# EAGLE board panel_2x1 (EAGLE 7.5.0)
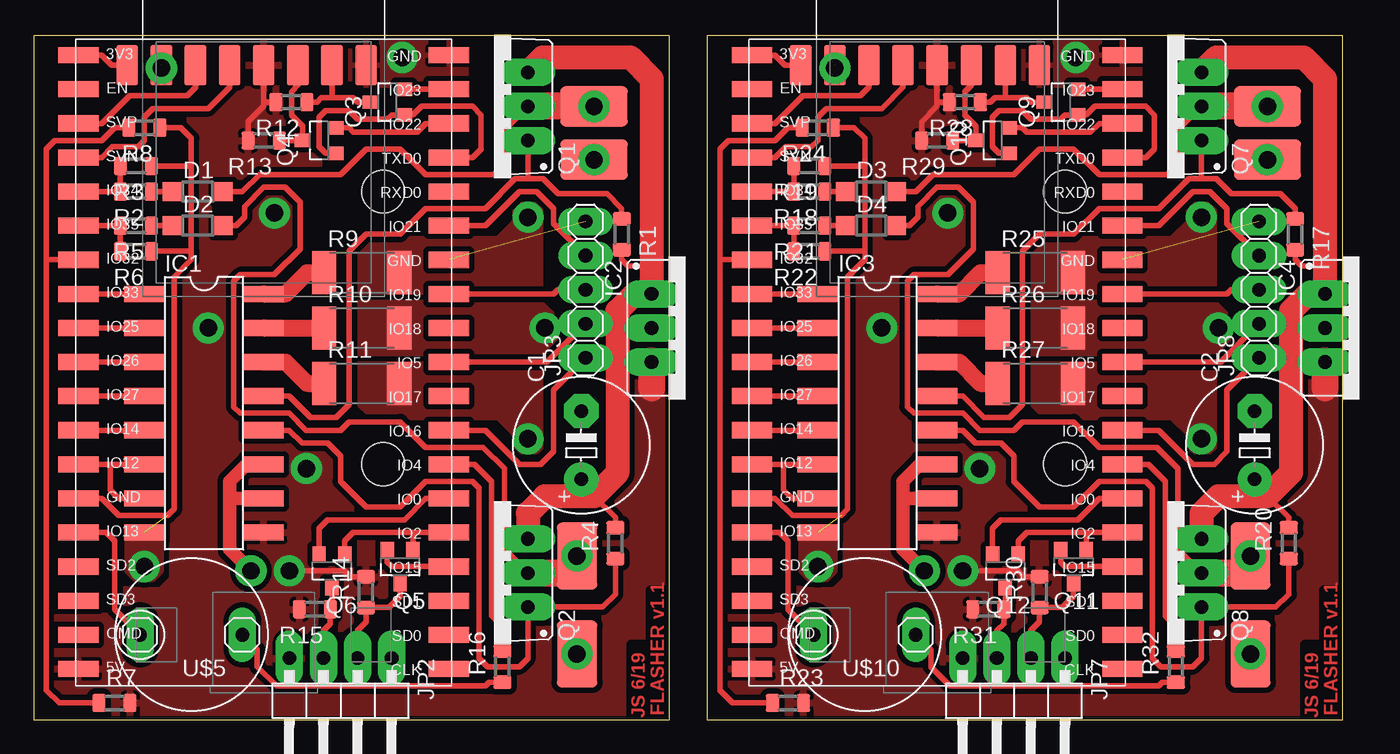
[diagram p0: board, top side]
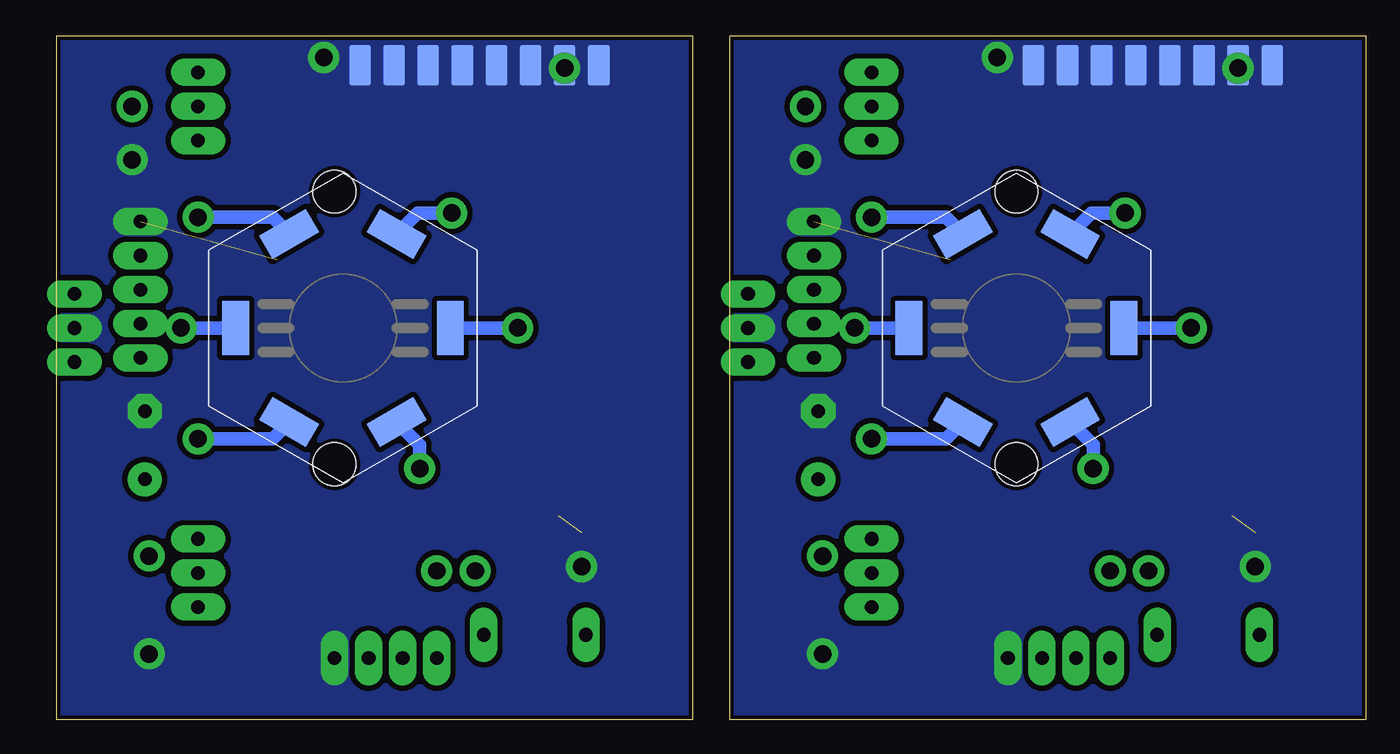
[diagram p1: board, bottom side, seen from below]

Size 97.53 x 51 mm. Coordinates in mm from the lower left corner, seen from the top.
Outline: 0,0 47.37,0 47.37,51 0,51 0,0
Outline: 50.16,0 97.53,0 97.53,51 50.16,51 50.16,0
Copper layers (1*16): Top 0.035mm / dielectric 1.5mm / Bottom 0.035mm
Design rules "homemade": minimum track width 0.4mm, minimum drill 0.8mm, track to track 0.4mm, track to pad 0.4mm, pad to pad 0.4mm, via to via 0.4mm, smd to smd 0mil, copper to edge 0.3mm, drill to drill 8mil, minimum pad ring 0.4mm, minimum via ring 0.3mm, stop-mask expansion 4mil, vias tented up to drill 0mil, thermal gap 10mil
Holes 3.2 mm at 26.04,39.37 26.04,19.05 76.83,39.37 76.83,19.05
tRestrict: area 23.1,16.2 to 28.9,21.9; area 23.1,36.5 to 28.9,42.3; area 73.3,16.2 to 79.1,21.9; area 73.3,36.5 to 79.1,42.3

## Footprints (pad centres in the part's own frame; a part is rotated, then mirrored left to right if it is on the bottom)
E5-10,5 = drill 1.016 pad 2.54: + -2.54,0 | drill 1.016 pad 2.54 octagon: - 2.54,0
SOD123 = smd 1.4 x 1.4: A 1.9,0; C -1.9,0
DIL16_BIG_SMD = smd 1.2 x 3: 1 -8.89,-4.445; 2 -6.35,-4.445; 3 -3.81,-4.445; 4 -1.27,-4.445; 5 1.27,-4.445; 6 3.81,-4.445; 7 6.35,-4.445; 8 8.89,-4.445; 9 8.89,4.445; 10 6.35,4.445; 11 3.81,4.445; 12 1.27,4.445; 13 -1.27,4.445; 14 -3.81,4.445; 15 -6.35,4.445; 16 -8.89,4.445
78XXS = drill 1.016 long: GND 0,-2.54; IN -2.54,-2.54; OUT 2.54,-2.54
DEVKITC_BIG_SMD = smd 3 x 1.2: 1 -13.8,46.99; 2 -13.8,44.45; 3 -13.8,41.91; 4 -13.8,39.37; 5 -13.8,36.83; 6 -13.8,34.29; 7 -13.8,31.75; 8 -13.8,29.21; 9 -13.8,26.67; 10 -13.8,24.13; 11 -13.8,21.59; 12 -13.8,19.05; 13 -13.8,16.51; 14 -13.8,13.97; 15 -13.8,11.43; 16 -13.8,8.89; 17 -13.8,6.35; 18 -13.8,3.81; 19 -13.8,1.27; 20 13.8,1.27; 21 13.8,3.81; 22 13.8,6.35; 23 13.8,8.89; 24 13.8,11.43; 25 13.8,13.97; 26 13.8,16.51; 27 13.8,19.05; 28 13.8,21.59; 29 13.8,24.13; 30 13.8,26.67; 31 13.8,29.21; 32 13.8,31.75; 33 13.8,34.29; 34 13.8,36.83; 35 13.8,39.37; 36 13.8,41.91; 37 13.8,44.45; 38 13.8,46.99
PINH2X04SMD = smd 1.6 x 3 bottom: B1 -3.81,-2; B2 -1.27,-2; B3 1.27,-2; B4 3.81,-2 | smd 1.6 x 3: T1 -3.81,-2; T2 -1.27,-2; T3 1.27,-2; T4 3.81,-2
1X04/90 = drill 1.016 long: 1 -3.81,-3.81; 2 -1.27,-3.81; 3 1.27,-3.81; 4 3.81,-3.81
1X05 = drill 1.016 long: 1 -5.08,0; 2 -2.54,0; 3 0,0; 4 2.54,0; 5 5.08,0
HEX_HEATSINK = smd 4 x 2 rotated 330: B+ 4,7; R- -4,-7 | smd 4 x 2 rotated 210: B- -4,7; R+ 4,-7 | smd 2 x 4: G+ 8,0; G- -8,0
TO220BV = drill 1.016 long: D 0,-2.54; G -2.54,-2.54; S 2.54,-2.54
SOT23_DIST = smd 1 x 1.2: 1 -0.95,-1.227; 2 0.95,-1.227; 3 0,1.227
R0805S = smd 1 x 1.35: 1 -1.15,0; 2 1.15,0
R2512 = smd 1.8 x 3.2: 1 -2.8,0; 2 2.8,0
3X5MM = smd 3 x 5: 1 0,0
PIEZO = drill 1.016 long: + 1.27,8.89; - 1.27,1.27

## Placement (x,y rotation side)
C1  [E5-10,5]  40.8,20.48 90 top
C2  [E5-10,5]  90.96,20.48 90 top
D1  [SOD123]  12.22,39.37 0 top
D2  [SOD123]  12.22,36.83 0 top
D3  [SOD123]  62.39,39.37 0 top
D4  [SOD123]  62.39,36.83 0 top
IC1  ULN2004A_BIG_SMD  [DIL16_BIG_SMD]  12.7,22.86 270 top
IC2  [78XXS]  48.58,29.21 270 top
IC3  ULN2004A_BIG_SMD  [DIL16_BIG_SMD]  62.87,22.86 270 top
IC4  [78XXS]  98.74,29.21 270 top
IM1  DEVKITC_BIG_SMD  [DEVKITC_BIG_SMD]  17.14,2.54 0 top
IM2  DEVKITC_BIG_SMD  [DEVKITC_BIG_SMD]  67.31,2.54 0 top
JP1  [PINH2X04SMD]  20.95,50.8 0 top
JP2  [1X04/90]  22.86,0.79 180 top
JP3  [1X05]  41.12,32.07 90 top
JP4  [PINH2X04SMD]  10.79,50.8 0 top
JP5  [PINH2X04SMD]  71.12,50.8 0 top
JP6  [PINH2X04SMD]  60.96,50.8 0 top
JP7  [1X04/90]  73.03,0.79 180 top
JP8  [1X05]  91.28,32.07 90 top
LED1  [HEX_HEATSINK]  26.04,29.21 0 bottom
LED2  [HEX_HEATSINK]  76.2,29.21 0 bottom
Q1  IRF4905  [TO220BV]  34.29,45.72 90 top
Q2  IRF4905  [TO220BV]  34.29,10.95 90 top
Q3  [SOT23_DIST]  26.35,46.04 90 top
Q4  [SOT23_DIST]  21.27,43.18 90 top
Q5  [SOT23_DIST]  27.3,11.43 180 top
Q6  [SOT23_DIST]  22.23,11.11 180 top
Q7  IRF4905  [TO220BV]  84.45,45.72 90 top
Q8  IRF4905  [TO220BV]  84.45,10.95 90 top
Q9  [SOT23_DIST]  76.52,46.04 90 top
Q10  [SOT23_DIST]  71.44,43.18 90 top
Q11  [SOT23_DIST]  77.47,11.43 180 top
Q12  [SOT23_DIST]  72.39,11.11 180 top
R1  100k  [R0805S]  43.81,36.2 270 top
R2  18k  [R0805S]  7.62,39.37 180 top
R3  33k  [R0805S]  7.62,41.27 180 top
R4  100k  [R0805S]  43.34,13.18 90 top
R5  18k  [R0805S]  7.62,36.83 180 top
R6  33k  [R0805S]  7.62,34.92 180 top
R7  4k7  [R0805S]  6.03,1.27 0 top
R8  1k  [R0805S]  8.26,44.13 180 top
R9  10R  [R2512]  24.45,33.34 0 top
R10  10R  [R2512]  24.45,29.21 0 top
R11  10R  [R2512]  24.45,25.08 0 top
R12  18k  [R0805S]  19.21,46.04 180 top
R13  18k  [R0805S]  17.14,43.18 180 top
R14  18k  [R0805S]  24.77,9.53 90 top
R15  18k  [R0805S]  20.95,8.26 180 top
R16  18k  [R0805S]  34.92,3.97 90 top
R17  100k  [R0805S]  93.98,36.2 270 top
R18  18k  [R0805S]  57.78,39.37 180 top
R19  33k  [R0805S]  57.78,41.27 180 top
R20  100k  [R0805S]  93.5,13.18 90 top
R21  18k  [R0805S]  57.78,36.83 180 top
R22  33k  [R0805S]  57.78,34.92 180 top
R23  4k7  [R0805S]  56.2,1.27 0 top
R24  1k  [R0805S]  58.42,44.13 180 top
R25  10R  [R2512]  74.61,33.34 0 top
R26  10R  [R2512]  74.61,29.21 0 top
R27  10R  [R2512]  74.61,25.08 0 top
R28  18k  [R0805S]  69.37,46.04 180 top
R29  18k  [R0805S]  67.31,43.18 180 top
R30  18k  [R0805S]  74.93,9.53 90 top
R31  18k  [R0805S]  71.12,8.26 180 top
R32  18k  [R0805S]  85.09,3.97 90 top
U$1  PAD_1SIDE_LARGE  [3X5MM]  41.75,45.72 270 top
U$2  PAD_1SIDE_LARGE  [3X5MM]  41.75,41.75 270 top
U$3  PAD_1SIDE_LARGE  [3X5MM]  40.48,12.22 180 top
U$4  PAD_1SIDE_LARGE  [3X5MM]  40.48,4.92 0 top
U$5  PIEZO  [PIEZO]  16.83,5.08 90 top
U$6  PAD_1SIDE_LARGE  [3X5MM]  91.92,45.72 270 top
U$7  PAD_1SIDE_LARGE  [3X5MM]  91.92,41.75 270 top
U$8  PAD_1SIDE_LARGE  [3X5MM]  90.65,12.22 180 top
U$9  PAD_1SIDE_LARGE  [3X5MM]  90.65,4.92 0 top
U$10  PIEZO  [PIEZO]  66.99,5.08 90 top

## Library data of the parts
C1 C2 R1-R32 = rcl_upravena
D1-D4 = diode
IC1 IC3 = uln-udn_upravena
IC2 IC4 = v-reg
IM1 IM2 = esp32
JP1 JP4-JP6 = pinhead_smd
JP2 JP3 JP7 JP8 = pinhead
LED1 LED2 = RGB_LED
Q1 Q2 Q7 Q8 = transistor-power
Q3-Q6 Q9-Q12 = transistors
U$1-U$4 U$6-U$9 = wirepad_smd
U$5 U$10 = piezo

## Nets
!B: IC1.16 R9.1
!B1: IC3.16 R25.1
!G: IC1.15 R10.1
!G1: IC3.15 R26.1
!PWR1_EN: IC1.13 Q1.G R1.1
!PWR1_EN1: IC3.13 Q7.G R17.1
!PWR2_EN: IC1.12 Q2.G R4.1
!PWR2_EN1: IC3.12 Q8.G R20.1
!R: IC1.14 R11.1
!R1: IC3.14 R27.1
!W: IC1.10 IC1.11
!W1: IC3.10 IC3.11
+3V1: IM2.1 JP6.T1
+3V3: IM1.1 JP4.T1
+5V: IC1.9 IC2.OUT IM1.19 JP1.T1 JP2.4 LED1.B+ LED1.G+ LED1.R+ R7.2 R12.2 R13.2 R14.2 R15.2
+5V1: IC3.9 IC4.OUT IM2.19 JP5.T1 JP7.4 LED2.B+ LED2.G+ LED2.R+ R23.2 R28.2 R29.2 R30.2 R31.2
B: IC1.1 IM1.8
B1: IC3.1 IM2.8
BA: LED1.B- R9.2
BA1: LED2.B- R25.2
BUZZ-N: R16.1 U$5.-
BUZZ-N1: R32.1 U$10.-
BUZZ_N: IM1.26 R16.2
BUZZ_N1: IM2.26 R32.2
BUZZ_P: IM1.15 U$5.+
BUZZ_P1: IM2.15 U$10.+
EN: IM1.2
EN1: IM2.2
G: IC1.2 IM1.9
G1: IC3.2 IM2.9
GA: LED1.G- R10.2
GA1: LED2.G- R26.2
GND: C1.- IC1.8 IC2.GND IM1.14 IM1.32 IM1.38 JP1.B1 JP1.B2 JP1.B3 JP1.B4 JP1.T4 JP2.1 JP3.5 JP4.B1 JP4.B2 JP4.B3 JP4.B4 JP4.T2 R3.1 R6.1 R8.1 U$2.1 U$4.1
GND1: C2.- IC3.8 IC4.GND IM2.14 IM2.32 IM2.38 JP5.B1 JP5.B2 JP5.B3 JP5.B4 JP5.T4 JP6.B1 JP6.B2 JP6.B3 JP6.B4 JP6.T2 JP7.1 JP8.5 R19.1 R22.1 R24.1 U$7.1 U$9.1
IO0: IM1.25 Q6.2
IO0_1: JP7.3 Q12.3 R31.1
IO0_5: JP2.3 Q6.3 R15.1
IO1: IM2.16
IO1_EN: IM1.24 Q5.1 Q6.1
IO1_EN1: IM2.24 Q11.1 Q12.1
IO2: IM2.17
IO2_EN: IM1.35 Q3.1 Q4.1
IO2_EN1: IM2.35 Q9.1 Q10.1
IO3: IM1.34
IO4: IM2.18
IO5: IM1.29 JP3.2
IO6: IM1.20
IO7: IM1.21
IO8: IM1.22
IO9: IM1.16
IO10: IM1.17
IO11: IM1.18
IO12: IM2.20
IO13: IM2.21
IO14: IM2.22
IO15: IM1.23 Q5.2
IO15_1: JP7.2 Q11.3 R30.1
IO15_5: JP2.2 Q5.3 R14.1
IO16: IM1.27 JP3.1
IO17: IM1.28
IO18: IM1.30
IO19: IM1.31 JP3.3
IO20: IM2.37 Q9.2
IO21: IM1.33 JP3.4
IO22: IM1.36 Q4.2
IO22_1: JP5.T2 Q10.3 R29.1
IO22_5: JP1.T2 Q4.3 R13.1
IO23: IM1.37 Q3.2
IO23_1: JP5.T3 Q9.3 R28.1
IO23_5: JP1.T3 Q3.3 R12.1
IO24: IM2.36 Q10.2
IO25: IM2.25 Q12.2
IO26: IM2.23 Q11.2
IO27: IM2.33 JP8.4
IO28: IM2.31 JP8.3
IO29: IM2.30
IO30: IM2.28
IO31: IM2.29 JP8.2
IO32: IM2.27 JP8.1
IO33: IM2.3 JP6.T3
IO34: IM2.4 JP6.T4
IO35: IM2.34
IO36: IM1.3 JP4.T3
IO39: IM1.4 JP4.T4
PWR1: D1.A Q1.D U$1.1
PWR1+: D1.C R2.1
PWR1+1: D3.C R18.1
PWR1_EN: IC1.4 IM1.11
PWR1_EN1: IC3.4 IM2.11
PWR1_MEAS: IM1.5 R2.2 R3.2
PWR1_MEAS1: IM2.5 R18.2 R19.2
PWR2: D2.A Q2.D U$3.1
PWR2+: D2.C R5.1
PWR2+1: D4.C R21.1
PWR2_EN: IC1.5 IM1.12
PWR2_EN1: IC3.5 IM2.12
PWR2_MEAS: IM1.6 R5.2 R6.2
PWR2_MEAS1: IM2.6 R21.2 R22.2
PWR3: D3.A Q7.D U$6.1
PWR4: D4.A Q8.D U$8.1
PWR_MEAS: IM1.7 R7.1 R8.2
PWR_MEAS1: IM2.7 R23.1 R24.2
R: IC1.3 IM1.10
R1: IC3.3 IM2.10
RA: LED1.R- R11.2
RA1: LED2.R- R27.2
VCC: C1.+ IC2.IN Q1.S Q2.S R1.2 R4.2
VCC1: C2.+ IC4.IN Q7.S Q8.S R17.2 R20.2
W: IC1.6 IC1.7 IM1.13
W1: IC3.6 IC3.7 IM2.13

## Tracks (layer width: path | path; a pad name or v marks a point on that pad's centre or on a via)
!B
  Top 1.27: IC1.16 18.79,31.75 20.38,33.34 R9.1
!B1
  Top 1.27: IC3.16 68.95,31.75 70.54,33.34 R25.1
!G
  Top 1.27: IC1.15 R10.1
!G1
  Top 1.27: IC3.15 R26.1
!PWR1_EN
  Top 0.406: IC1.13 19.05,24.13 20.64,22.54 22.54,22.54 23.5,23.5 23.5,34.92 24.77,36.2 27.3,36.2 29.21,38.1 33.66,38.1 35.88,40.32 36.83,40.32 | 36.83,40.32 37.94,40.32 39.05,39.21 42.7,39.21 43.81,38.1 R1.1 | Q1.G 36.83,40.32
!PWR1_EN1
  Top 0.406: IC3.13 69.22,24.13 70.8,22.54 72.71,22.54 73.66,23.5 73.66,34.92 74.93,36.2 77.47,36.2 79.38,38.1 83.82,38.1 86.04,40.32 87,40.32 | 87,40.32 88.11,40.32 89.22,39.21 92.87,39.21 93.98,38.1 R17.1 | Q7.G 87,40.32
!PWR2_EN
  Top 0.406: IC1.12 19.05,21.59 20,20.64 21.91,20.64 22.86,19.68 22.86,17.78 24.77,15.88 27.3,15.88 29.21,17.78 32.7,17.78 33.18,17.3 33.18,4.6 33.81,3.97 36.2,3.97 36.83,4.6 Q2.G 42.39,8.41 43.34,9.37 R4.1
!PWR2_EN1
  Top 0.406: IC3.12 69.22,21.59 70.17,20.64 72.07,20.64 73.03,19.68 73.03,17.78 74.93,15.88 77.47,15.88 79.38,17.78 82.87,17.78 83.34,17.3 83.34,4.6 83.98,3.97 86.36,3.97 87,4.6 Q8.G 92.55,8.41 93.5,9.37 R20.1
!R
  Top 1.27: IC1.14 18.79,26.67 20.38,25.08 R11.1
!R1
  Top 1.27: IC3.14 68.95,26.67 70.54,25.08 R27.1
!W  (via drill 1.3)
  Top 1.016: IC1.11 15.88,19.05 14.61,17.78 14.61,16.51 | 14.61,16.51 14.61,12.7 v16.19,11.11 | IC1.10 14.61,16.51
!W1  (via drill 1.3)
  Top 1.016: IC3.11 66.04,19.05 64.77,17.78 64.77,16.51 | 64.77,16.51 64.77,12.7 v66.36,11.11 | IC3.10 64.77,16.51
+3V1
  Top 0.406: IM2.1 55.24,49.53 55.98,48.8 JP6.T1
+3V3
  Top 0.406: IM1.1 5.08,49.53 5.81,48.8 JP4.T1
+5V  (via drill 1.3)
  Top 0.406: JP1.T1 17.14,46.04 | 17.14,46.04 17.14,45.72 15.99,44.57 R13.2 | R12.2 17.14,46.04 | R14.2 23.61,10.68 23.18,11.11 v19.05,11.11
  Top 2: IC2.OUT 46.04,24.77
  Bottom 1.016: LED1.R+ 20.32,20.5 v20.32,18.73 | LED1.G+ v13.02,29.21 | LED1.B+ 20.46,37.78 v17.94,37.78
  pour Top (rank 3): 0,50.8 0,0 47.47,0 47.47,50.8
+5V1  (via drill 1.3)
  Top 0.406: JP5.T1 67.31,46.04 | 67.31,46.04 67.31,45.72 66.16,44.57 R29.2 | R28.2 67.31,46.04 | R30.2 73.78,10.68 73.34,11.11 v69.22,11.11
  Top 2: IC4.OUT 96.2,24.77
  Bottom 1.016: LED2.R+ 70.48,20.5 v70.48,18.73 | LED2.G+ v63.18,29.21 | LED2.B+ 70.63,37.78 v68.1,37.78
  pour Top (rank 3): 50.16,50.8 50.16,0 97.63,0 97.63,50.8
B
  Top 0.406: IM1.8 IC1.1
B1
  Top 0.406: IM2.8 IC3.1
BA  (via drill 1.3)
  Bottom 1.016: LED1.B- 31.29,37.47 v36.83,37.47
  pour Top (rank 2, no thermals): 23.97,31.75 37.78,31.75 37.78,38.1 37.47,38.42 36.2,38.42 35.88,38.1 35.88,37.15 34.61,35.88 25.24,35.88 23.97,34.61
BA1  (via drill 1.3)
  Bottom 1.016: LED2.B- 81.45,37.47 v87,37.47
  pour Top (rank 2, no thermals): 74.14,31.75 87.95,31.75 87.95,38.1 87.63,38.42 86.36,38.42 86.04,38.1 86.04,37.15 84.77,35.88 75.41,35.88 74.14,34.61
BUZZ-N
  Top 0.406: U$5.- 16.67,5.24 16.67,3.97 18.1,2.54 33.66,2.54 33.93,2.82 R16.1
BUZZ-N1
  Top 0.406: U$10.- 66.83,5.24 66.83,3.97 68.26,2.54 83.82,2.54 84.1,2.82 R32.1
BUZZ_N
  Top 0.406: IM1.26 32.86,19.05 34.13,17.78 34.13,7.78 34.92,6.99 R16.2
BUZZ_N1
  Top 0.406: IM2.26 83.03,19.05 84.3,17.78 84.3,7.78 85.09,6.99 R32.2
BUZZ_P
  Top 0.406: IM1.15 5.4,13.97 6.03,13.34 6.03,8.26 U$5.+
BUZZ_P1
  Top 0.406: IM2.15 55.56,13.97 56.2,13.34 56.2,8.26 U$10.+
G
  Top 0.406: IM1.9 IC1.2
G1
  Top 0.406: IM2.9 IC3.2
GA  (via drill 1.3)
  Bottom 1.016: LED1.G- v38.1,29.21
  pour Top (no thermals): 23.97,31.11 37.78,31.11 39.05,29.84 39.05,28.57 37.78,27.3 23.97,27.3
GA1  (via drill 1.3)
  Bottom 1.016: LED2.G- v88.27,29.21
  pour Top (no thermals): 74.14,31.11 87.95,31.11 89.22,29.84 89.22,28.57 87.95,27.3 74.14,27.3
GND  (via drill 1.3)  (3 unrouted)
  Top 0.406: IM1.14 5.08,16.51 6.35,15.24 10,15.24 10.48,15.72 10.48,33.02 11.75,34.29 11.75,34.92 | R6.1 11.75,34.92 | 11.75,34.92 11.75,41.27 | 11.75,41.27 11.75,43.34 10.95,44.13 R8.1 | R3.1 11.75,41.27
  other vias: 8.26,11.43 27.46,49.37 9.53,48.58 41.75,41.75 40.48,4.92
  pour Top (no thermals): 6.99,14.29 9.53,14.29 9.53,11.11 8.89,10.48 7.62,10.48 6.99,11.11
  pour Bottom (rank 3, no thermals): 0,0 47.62,0 47.62,50.8 0,50.8
  pour Top: 23.5,50.8 32.23,50.8 32.23,45.72 28.57,45.72 26.99,47.31 23.5,47.31
GND1  (via drill 1.3)  (3 unrouted)
  Top 0.406: IM2.14 55.24,16.51 56.52,15.24 60.17,15.24 60.64,15.72 60.64,33.02 61.91,34.29 61.91,34.92 | R22.1 61.91,34.92 | 61.91,34.92 61.91,41.27 | 61.91,41.27 61.91,43.34 61.12,44.13 R24.1 | R19.1 61.91,41.27
  other vias: 58.42,11.43 77.63,49.37 59.69,48.58 91.92,41.75 90.65,4.92
  pour Top (no thermals): 57.15,14.29 59.69,14.29 59.69,11.11 59.05,10.48 57.78,10.48 57.15,11.11
  pour Bottom (rank 3, no thermals): 50.16,0 97.79,0 97.79,50.8 50.16,50.8
  pour Top: 73.66,50.8 82.39,50.8 82.39,45.72 78.74,45.72 77.15,47.31 73.66,47.31
IO0
  Top 0.406: IM1.25 29.21,16.51 27.62,14.92 21.91,14.92 21.27,14.29 Q6.2
IO0_1
  Top 0.406: Q12.3 72.39,8.26 R31.1 72.27,7.18 71.75,6.67 JP7.3
IO0_5
  Top 0.406: Q6.3 22.23,8.26 R15.1 22.11,7.18 21.59,6.67 JP2.3
IO1_EN
  Top 0.406: IM1.24 28.26,13.97 | 28.26,13.97 23.81,13.97 23.18,13.34 Q6.1 | Q5.1 28.25,13.97 28.26,13.97
IO1_EN1
  Top 0.406: IM2.24 78.42,13.97 | 78.42,13.97 73.98,13.97 73.34,13.34 Q12.1 | Q11.1 78.42,13.97
IO2_EN
  Top 0.406: Q4.1 21.75,42.23 21.27,42.7 21.27,44.93 21.75,45.4 23.5,45.4 24.13,44.77 26.35,44.77 26.67,45.09 Q3.1 28.26,45.09 28.89,45.72 32.7,45.72 33.34,45.09 33.34,42.55 32.7,41.91 IM1.35
IO2_EN1
  Top 0.406: Q10.1 71.91,42.23 71.44,42.7 71.44,44.93 71.91,45.4 73.66,45.4 74.3,44.77 76.52,44.77 76.83,45.09 Q9.1 78.42,45.09 79.06,45.72 82.87,45.72 83.5,45.09 83.5,42.55 82.87,41.91 IM2.35
IO5
  Top 0.406: IM1.29 38.26,26.67 JP3.2
IO15
  Top 0.406: IM1.23 26.67,11.43 26.35,11.75 Q5.2
IO15_1
  Top 0.406: Q11.3 77.47,9.21 76.64,8.38 R30.1 74.93,7.3 74.3,6.67 JP7.2
IO15_5
  Top 0.406: Q5.3 27.3,9.21 26.47,8.38 R14.1 24.77,7.3 24.13,6.67 JP2.2
IO16
  Top 0.406: IM1.27 33.66,21.59 36.2,19.05 37.78,19.05 38.73,20 38.73,24.61 JP3.1
IO19
  Top 0.406: IM1.31 38.73,31.75 39.05,32.07 JP3.3
IO20
  Top 0.406: Q9.2 IM2.37
IO21
  Top 0.406: IM1.33 33.66,36.83 36.2,39.37 37.47,39.37 38.73,38.1 38.73,36.99 JP3.4
IO22
  Top 0.406: IM1.36 29.21,44.45 28.57,43.81 23.81,43.81 23.5,44.13 Q4.2
IO22_1
  Top 0.406: JP5.T2 69.85,47.31 69.37,46.83 69.37,45.09 70.21,44.25 Q10.3 R29.1
IO22_5
  Top 0.406: JP1.T2 19.68,47.31 19.21,46.83 19.21,45.09 20.05,44.25 Q4.3 R13.1
IO23
  Top 0.406: Q3.2 IM1.37
IO23_1
  Top 0.406: Q9.3 74.3,46.04 73.98,46.35 72.39,46.35 | 72.39,46.35 JP5.T3 | R28.1 71.28,46.04 71.6,46.35 72.39,46.35
IO23_5
  Top 0.406: Q3.3 24.13,46.04 23.81,46.35 22.23,46.35 | 22.23,46.35 JP1.T3 | R12.1 21.11,46.04 21.43,46.35 22.23,46.35
IO24
  Top 0.406: IM2.36 79.38,44.45 78.74,43.81 73.98,43.81 73.66,44.13 Q10.2
IO25
  Top 0.406: IM2.25 79.38,16.51 77.79,14.92 72.07,14.92 71.44,14.29 Q12.2
IO26
  Top 0.406: IM2.23 76.83,11.43 76.52,11.75 Q11.2
IO27
  Top 0.406: IM2.33 83.82,36.83 86.36,39.37 87.63,39.37 88.9,38.1 88.9,36.99 JP8.4
IO28
  Top 0.406: IM2.31 88.9,31.75 89.22,32.07 JP8.3
IO31
  Top 0.406: IM2.29 88.42,26.67 JP8.2
IO32
  Top 0.406: IM2.27 83.82,21.59 86.36,19.05 87.95,19.05 88.9,20 88.9,24.61 JP8.1
IO33
  Top 0.406: IM2.3 55.24,44.45 57.31,46.51 61.59,46.51 62.23,47.15 JP6.T3
IO34
  Top 0.406: IM2.4 55.24,41.91 56.04,42.7 57.94,42.7 58.42,43.18 58.42,44.93 59.05,45.56 63.18,45.56 64.77,47.15 JP6.T4
IO36
  Top 0.406: IM1.3 5.08,44.45 7.14,46.51 11.43,46.51 12.06,47.15 JP4.T3
IO39
  Top 0.406: IM1.4 5.08,41.91 5.87,42.7 7.78,42.7 8.26,43.18 8.26,44.93 8.89,45.56 13.02,45.56 14.61,47.15 JP4.T4
PWR1  (via drill 1.3)
  Top 0.406: D1.A 15.56,39.37 16.83,40.64 22.86,40.64 24.77,42.55 27.3,42.55 29.21,40.64 34.29,40.64 35.08,41.43 35.08,43.97 Q1.D
  Top 2: U$1.1 Q1.D
  other vias: 41.75,45.72
PWR1+
  Top 0.406: R2.1 D1.C
PWR1+1
  Top 0.406: R18.1 D3.C
PWR1_EN
  Top 0.406: IM1.11 IC1.4
PWR1_EN1
  Top 0.406: IM2.11 IC3.4
PWR1_MEAS
  Top 0.406: IM1.5 R2.2 R3.2
PWR1_MEAS1
  Top 0.406: IM2.5 R18.2 R19.2
PWR2  (via drill 1.3)
  Top 0.406: D2.A 15.08,36.83 15.72,37.47 15.72,38.26 17.14,39.69 18.73,39.69 19.84,38.58 19.84,35.08 17.94,33.18 15.4,33.18 14.92,32.7 14.92,23.34 15.4,22.86 19.05,22.86 20.32,21.59 22.86,21.59 23.5,22.23 27.3,22.23 29.21,20.32 33.5,20.32 35.08,18.73 35.08,12.7 Q2.D
  Top 2: Q2.D 40.48,10.95 U$3.1
  other vias: 40.48,12.22
PWR2+
  Top 0.406: R5.1 D2.C
PWR2+1
  Top 0.406: R21.1 D4.C
PWR2_EN
  Top 0.406: IM1.12 IC1.5
PWR2_EN1
  Top 0.406: IM2.12 IC3.5
PWR2_MEAS
  Top 0.406: IM1.6 R5.2 R6.2
PWR2_MEAS1
  Top 0.406: IM2.6 R21.2 R22.2
PWR3  (via drill 1.3)
  Top 0.406: D3.A 65.72,39.37 66.99,40.64 73.03,40.64 74.93,42.55 77.47,42.55 79.38,40.64 84.45,40.64 85.25,41.43 85.25,43.97 Q7.D
  Top 2: U$6.1 Q7.D
  other vias: 91.92,45.72
PWR4  (via drill 1.3)
  Top 0.406: D4.A 65.25,36.83 65.88,37.47 65.88,38.26 67.31,39.69 68.9,39.69 70.01,38.58 70.01,35.08 68.1,33.18 65.56,33.18 65.09,32.7 65.09,23.34 65.56,22.86 69.22,22.86 70.48,21.59 73.03,21.59 73.66,22.23 77.47,22.23 79.38,20.32 83.66,20.32 85.25,18.73 85.25,12.7 Q8.D
  Top 2: Q8.D 90.65,10.95 U$8.1
  other vias: 90.65,12.22
PWR_MEAS
  Top 0.406: R7.1 1.91,1.27 0.95,2.22 0.95,34.29 | 0.95,34.29 0.95,42.55 1.59,43.18 5.08,43.18 6.03,44.13 R8.2 | IM1.7 0.95,34.29
PWR_MEAS1
  Top 0.406: R23.1 52.07,1.27 51.12,2.22 51.12,34.29 | 51.12,34.29 51.12,42.55 51.75,43.18 55.24,43.18 56.2,44.13 R24.2 | IM2.7 51.12,34.29
R
  Top 0.406: IM1.10 IC1.3
R1
  Top 0.406: IM2.10 IC3.3
RA  (via drill 1.3)
  Bottom 1.016: LED1.R- 31.29,20.95 v36.83,20.95
  pour Top (rank 2, no thermals): 23.97,26.67 37.78,26.67 37.78,20.32 37.47,20 36.2,20 35.88,20.32 35.88,21.27 34.61,22.54 25.24,22.54 23.97,23.81
RA1  (via drill 1.3)
  Bottom 1.016: LED2.R- 81.45,20.95 v87,20.95
  pour Top (rank 2, no thermals): 74.14,26.67 87.95,26.67 87.95,20.32 87.63,20 86.36,20 86.04,20.32 86.04,21.27 84.77,22.54 75.41,22.54 74.14,23.81
VCC
  Top 0.406: R4.2 43.34,15.08 41.75,16.67 | R1.2 43.81,34.29 44.29,33.81 46.04,33.81
  Top 1.778: Q1.S 37.94,49.37 44.45,49.37 46.04,47.78 46.04,33.81 IC2.IN 44.77,31.75 43.5,30.48 43.5,18.41 41.75,16.67 40.8,16.67 | 40.8,16.67 38.1,16.67 36.83,15.4 Q2.S | C1.+ 40.8,16.67
VCC1
  Top 0.406: R20.2 93.5,15.08 91.92,16.67 | R17.2 93.98,34.29 94.46,33.81 96.2,33.81
  Top 1.778: Q7.S 88.11,49.37 94.61,49.37 96.2,47.78 96.2,33.81 IC4.IN 94.93,31.75 93.66,30.48 93.66,18.41 91.92,16.67 90.96,16.67 | 90.96,16.67 88.27,16.67 87,15.4 Q8.S | C2.+ 90.96,16.67
W
  Top 0.406: IM1.13 5.71,19.05 | 5.71,19.05 IC1.6 | IC1.7 6.35,16.51 5.71,17.14 5.71,19.05
W1
  Top 0.406: IM2.13 55.88,19.05 | 55.88,19.05 IC3.6 | IC3.7 56.52,16.51 55.88,17.14 55.88,19.05

## Text on the board
Top: JS 6/19 | FLASHER v1.1 | JS 6/19 | FLASHER v1.1